# EAGLE board PCB_LEDversion1 (EAGLE 9.2.0)
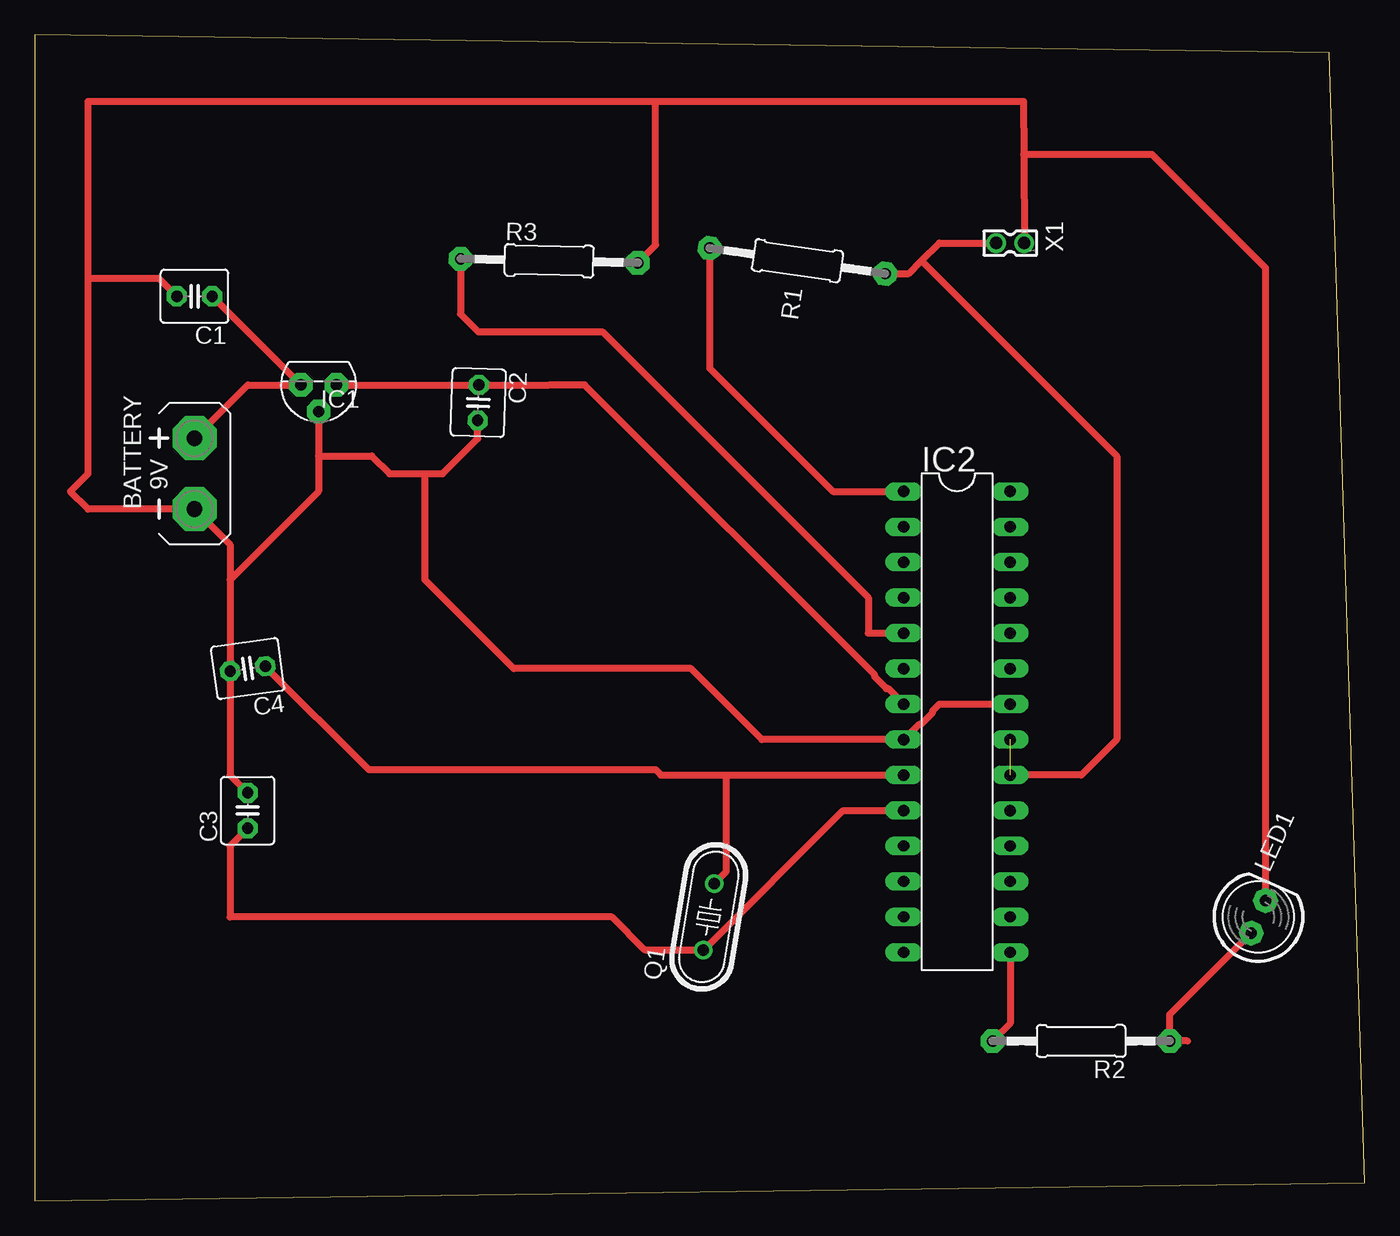
[diagram p0: board, top side]

Size 95.23 x 83.49 mm. Coordinates in mm from the lower left corner, seen from the top.
Outline: 0,0 95.23,1.27 92.69,82.22 0,83.49 0,0
Copper layers (1*16): Top 0.035mm / dielectric 1.5mm / Bottom 0.035mm
Design rules "default": minimum track width 6mil, minimum drill 0.35mm, track to track 6mil, track to pad 6mil, pad to pad 6mil, via to via 6mil, smd to smd 6mil, copper to edge 40mil, drill to drill 6mil, minimum pad ring 10mil, minimum via ring 8mil, stop-mask expansion 4mil, vias tented up to drill 0mil, thermal gap 10mil
Net classes: 0 default: width 0.508 mm, clearance 0.508 mm

## Footprints (pad centres in the part's own frame; a part is rotated, then mirrored left to right if it is on the bottom)
AB9V = drill 1.118 pad 3.15 octagon: + 0,2.54; - 0,-2.54
C025-040X050 = drill 0.813 pad 1.422 octagon: 1 -1.27,0; 2 1.27,0
TO92 = drill 0.813 pad 1.676 octagon: 1 -1.27,0; 2 0,1.905; 3 1.27,0
DIL28-3 = drill 0.813 long: 1 -16.51,-3.81; 2 -13.97,-3.81; 3 -11.43,-3.81; 4 -8.89,-3.81; 5 -6.35,-3.81; 6 -3.81,-3.81; 7 -1.27,-3.81; 8 1.27,-3.81; 9 3.81,-3.81; 10 6.35,-3.81; 11 8.89,-3.81; 12 11.43,-3.81; 13 13.97,-3.81; 14 16.51,-3.81; 15 16.51,3.81; 16 13.97,3.81; 17 11.43,3.81; 18 8.89,3.81; 19 6.35,3.81; 20 3.81,3.81; 21 1.27,3.81; 22 -1.27,3.81; 23 -3.81,3.81; 24 -6.35,3.81; 25 -8.89,3.81; 26 -11.43,3.81; 27 -13.97,3.81; 28 -16.51,3.81
LED5MM = drill 0.813 pad 1.676 octagon: A -1.27,0; K 1.27,0
HC49/S = drill 0.813: 1 -2.413,0; 2 2.413,0
0207/12 = drill 0.813 pad 1.676 octagon: 1 -6.35,0; 2 6.35,0
332-02 = drill 0.9 pad 1.27: 1 0,-1; 2 0,1

## Placement (x,y rotation side)
BATTERY  9V  [AB9V]  11.43,52.07 0 top
C1  10uF  [C025-040X050]  11.43,64.77 180 top
C2  10uF  [C025-040X050]  31.75,57.15 268.1 top
C3  22pF  [C025-040X050]  15.24,27.94 90 top
C4  22pF  [C025-040X050]  15.24,38.1 187.8 top
IC1  7805L  [TO92]  20.32,58.42 180 top
IC2  ATMEGA328-20P  [DIL28-3]  66.04,34.29 270 top
LED1  [LED5MM]  87.63,20.32 66 top
Q1  [HC49/S]  48.26,20.32 80.8 top
R1  10K  [0207/12]  54.61,67.31 171.7 top
R2  100ohm  [0207/12]  74.93,11.43 180 top
R3  10k  [0207/12]  36.83,67.31 358.7 top
X1  332-02  [332-02]  69.85,68.58 90 top

## Library data of the parts
BATTERY = battery
C1-C4 IC1 LED1 R1 R2 = adafruit
IC2 = atmega328
Q1 = adafruit; OC_FARNELL: 1667008; OC_NEWARK: unknown
R3 = adafruit; SPICEPREFIX: R
X1 = con-garry

## Nets
GND: BATTERY.- C1.2 C2.2 C3.2 C4.2 IC1.2 IC2.8 IC2.22 LED1.K R3.2 X1.1
N$1: IC2.1 R1.2
N$2: C4.1 IC2.9 Q1.2
N$3: C3.1 IC2.10 Q1.1
N$4: BATTERY.+ C1.1 IC1.3
N$5: C2.1 IC1.1 IC2.7
N$6: IC2.5 R3.1
N$7: IC2.15 R2.2
N$8: LED1.A R2.1
VCC: IC2.20 IC2.21 R1.1 X1.2

## Tracks (layer width: path | path; a pad name or v marks a point on that pad's centre or on a via)
GND
  Top 0.508: 19.97,56.16 IC1.2 20.32,53.34 | 3.81,66.04 3.81,52.07 2.54,50.8 3.81,49.53 BATTERY.- 13.98,46.98 13.98,44.45 | 3.81,66.04 3.81,78.74 44.45,78.74 | 70.82,74.93 70.8,78.74 44.45,78.74 | 70.82,74.93 X1.1 | 13.98,44.45 C4.2 13.98,30.47 C3.2 | 20.32,53.34 20.32,50.79 13.98,44.45 | C1.2 8.89,66.04 3.81,66.04 | 20.32,53.34 24.13,53.34 25.4,52.07 27.94,52.07 | 27.94,52.07 29.21,52.07 31.71,54.57 C2.2 | 27.94,52.07 27.94,44.45 34.29,38.1 46.99,38.1 52.07,33.02 IC2.8 63.35,34.14 63.48,34.14 64.31,34.97 64.31,35.1 64.77,35.56 IC2.22 | R3.2 44.45,68.44 44.45,78.74 | LED1.K 88.15,66.79 80.01,74.93 70.82,74.93
N$1
  Top 0.508: R1.2 48.33,59.62 57.15,50.8 IC2.1
N$2
  Top 0.508: C4.1 23.91,30.87 44.45,30.87 44.84,30.48 49.53,30.48 | 49.53,30.48 IC2.9 | Q1.2 49.53,23.59 49.53,30.48
N$3
  Top 0.508: C3.1 13.97,25.4 13.97,20.32 41.32,20.32 43.7,17.94 Q1.1 57.88,27.94 IC2.10
N$4
  Top 0.508: BATTERY.+ 15.24,58.42 IC1.3 C1.1
N$5
  Top 0.508: IC1.1 C2.1 36.83,58.42 39.37,58.42 60.15,37.64 60.15,37.51 60.98,36.68 61.11,36.68 IC2.7
N$6
  Top 0.508: R3.1 30.48,63.5 31.75,62.23 40.64,62.23 59.69,43.18 59.69,40.64 IC2.5
N$7
  Top 0.508: IC2.15 69.85,12.7 R2.2
N$8
  Top 0.508: 82.55,11.43 R2.1 81.28,13.33 LED1.A
VCC  (1 unrouted)
  Top 0.508: R1.1 62.58,66.39 63.5,67.31 | 63.5,67.31 64.77,68.58 X1.2 | 63.5,67.31 77.47,53.34 77.47,33.02 74.93,30.48 IC2.20